# EAGLE board Ges_AndriX (EAGLE 6.4)
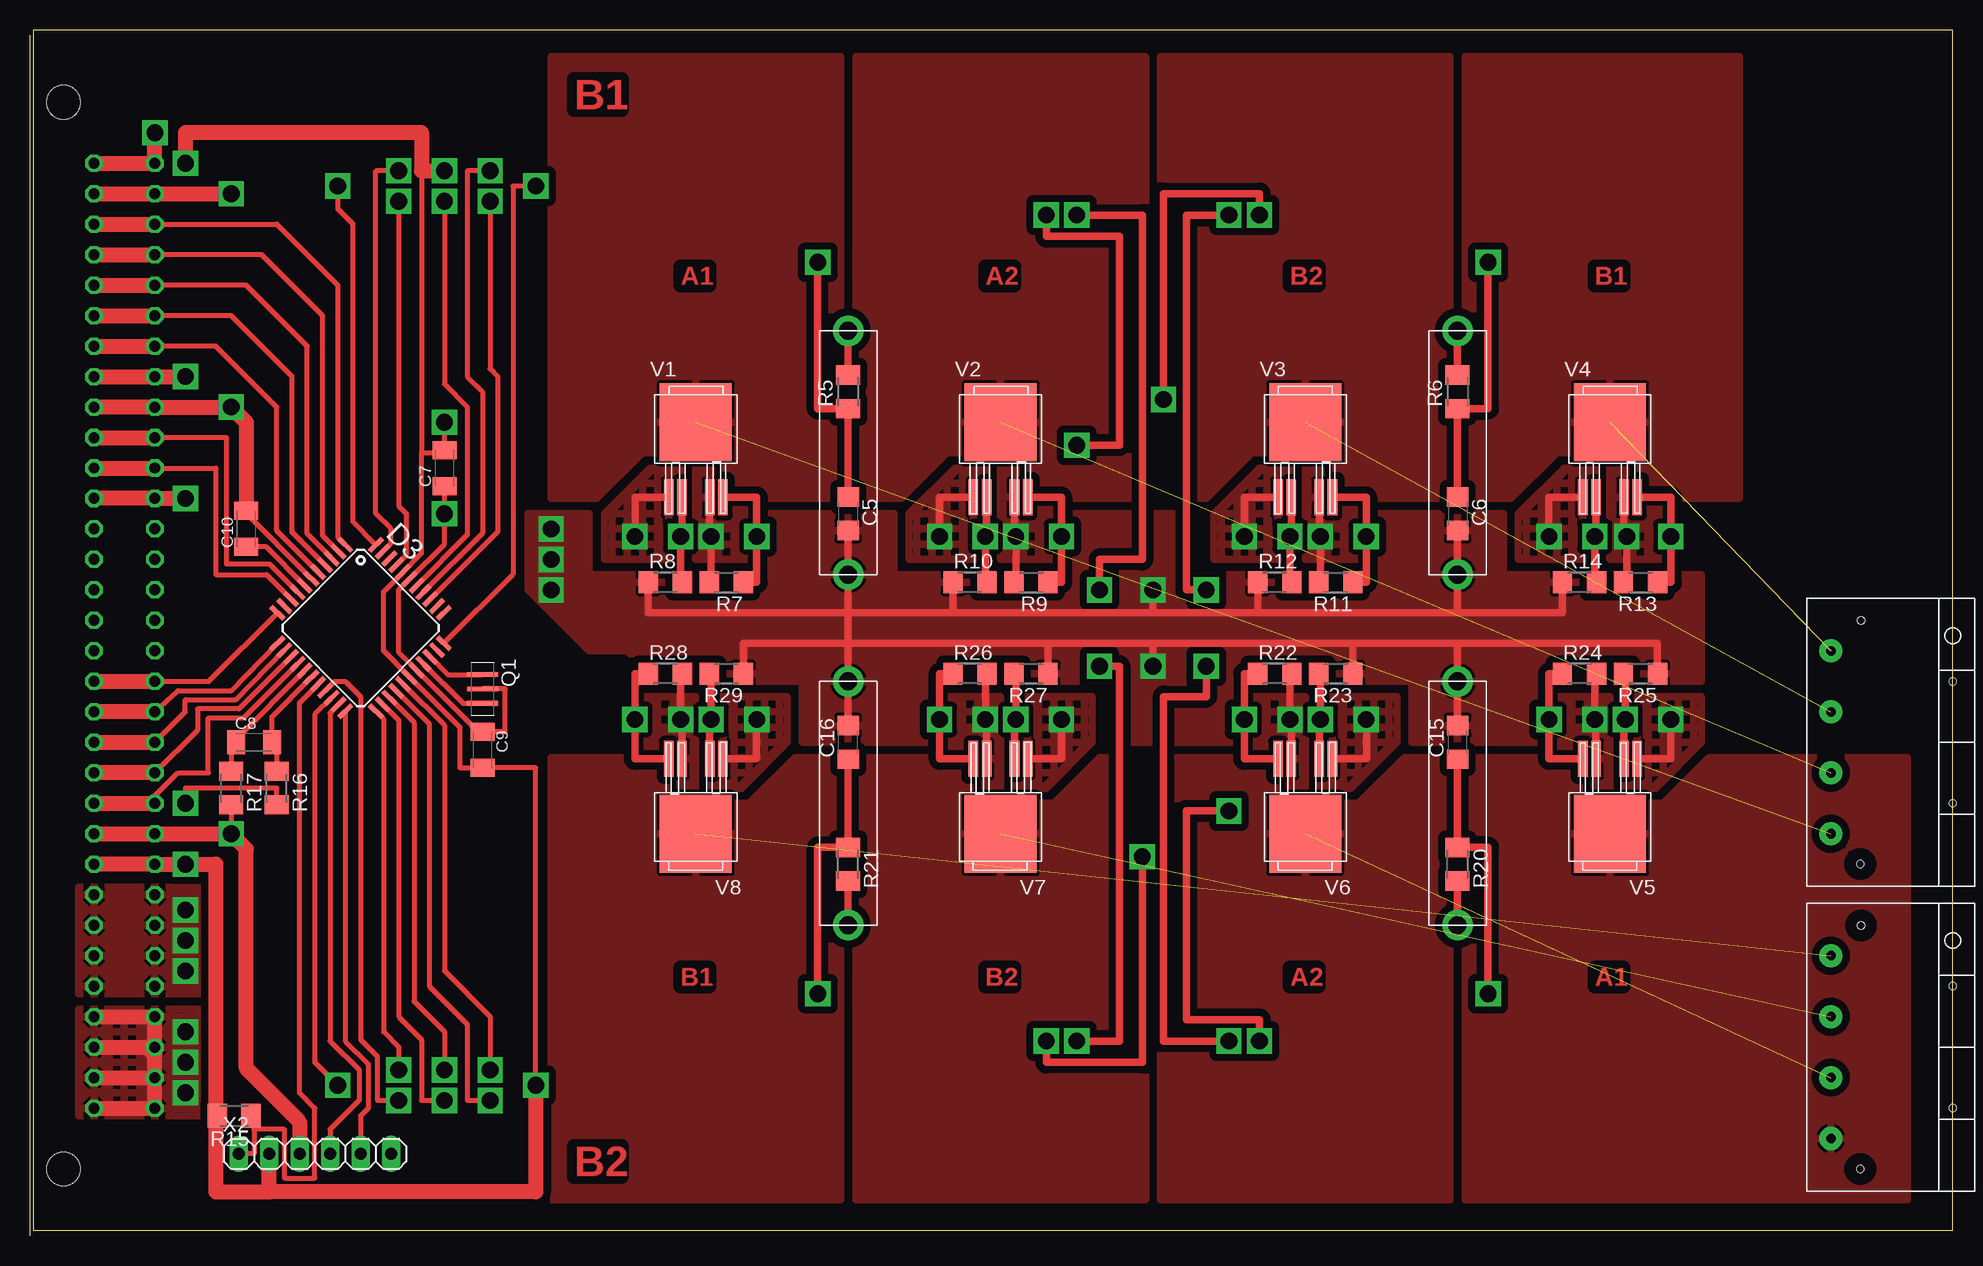
[diagram p0: board, top side]
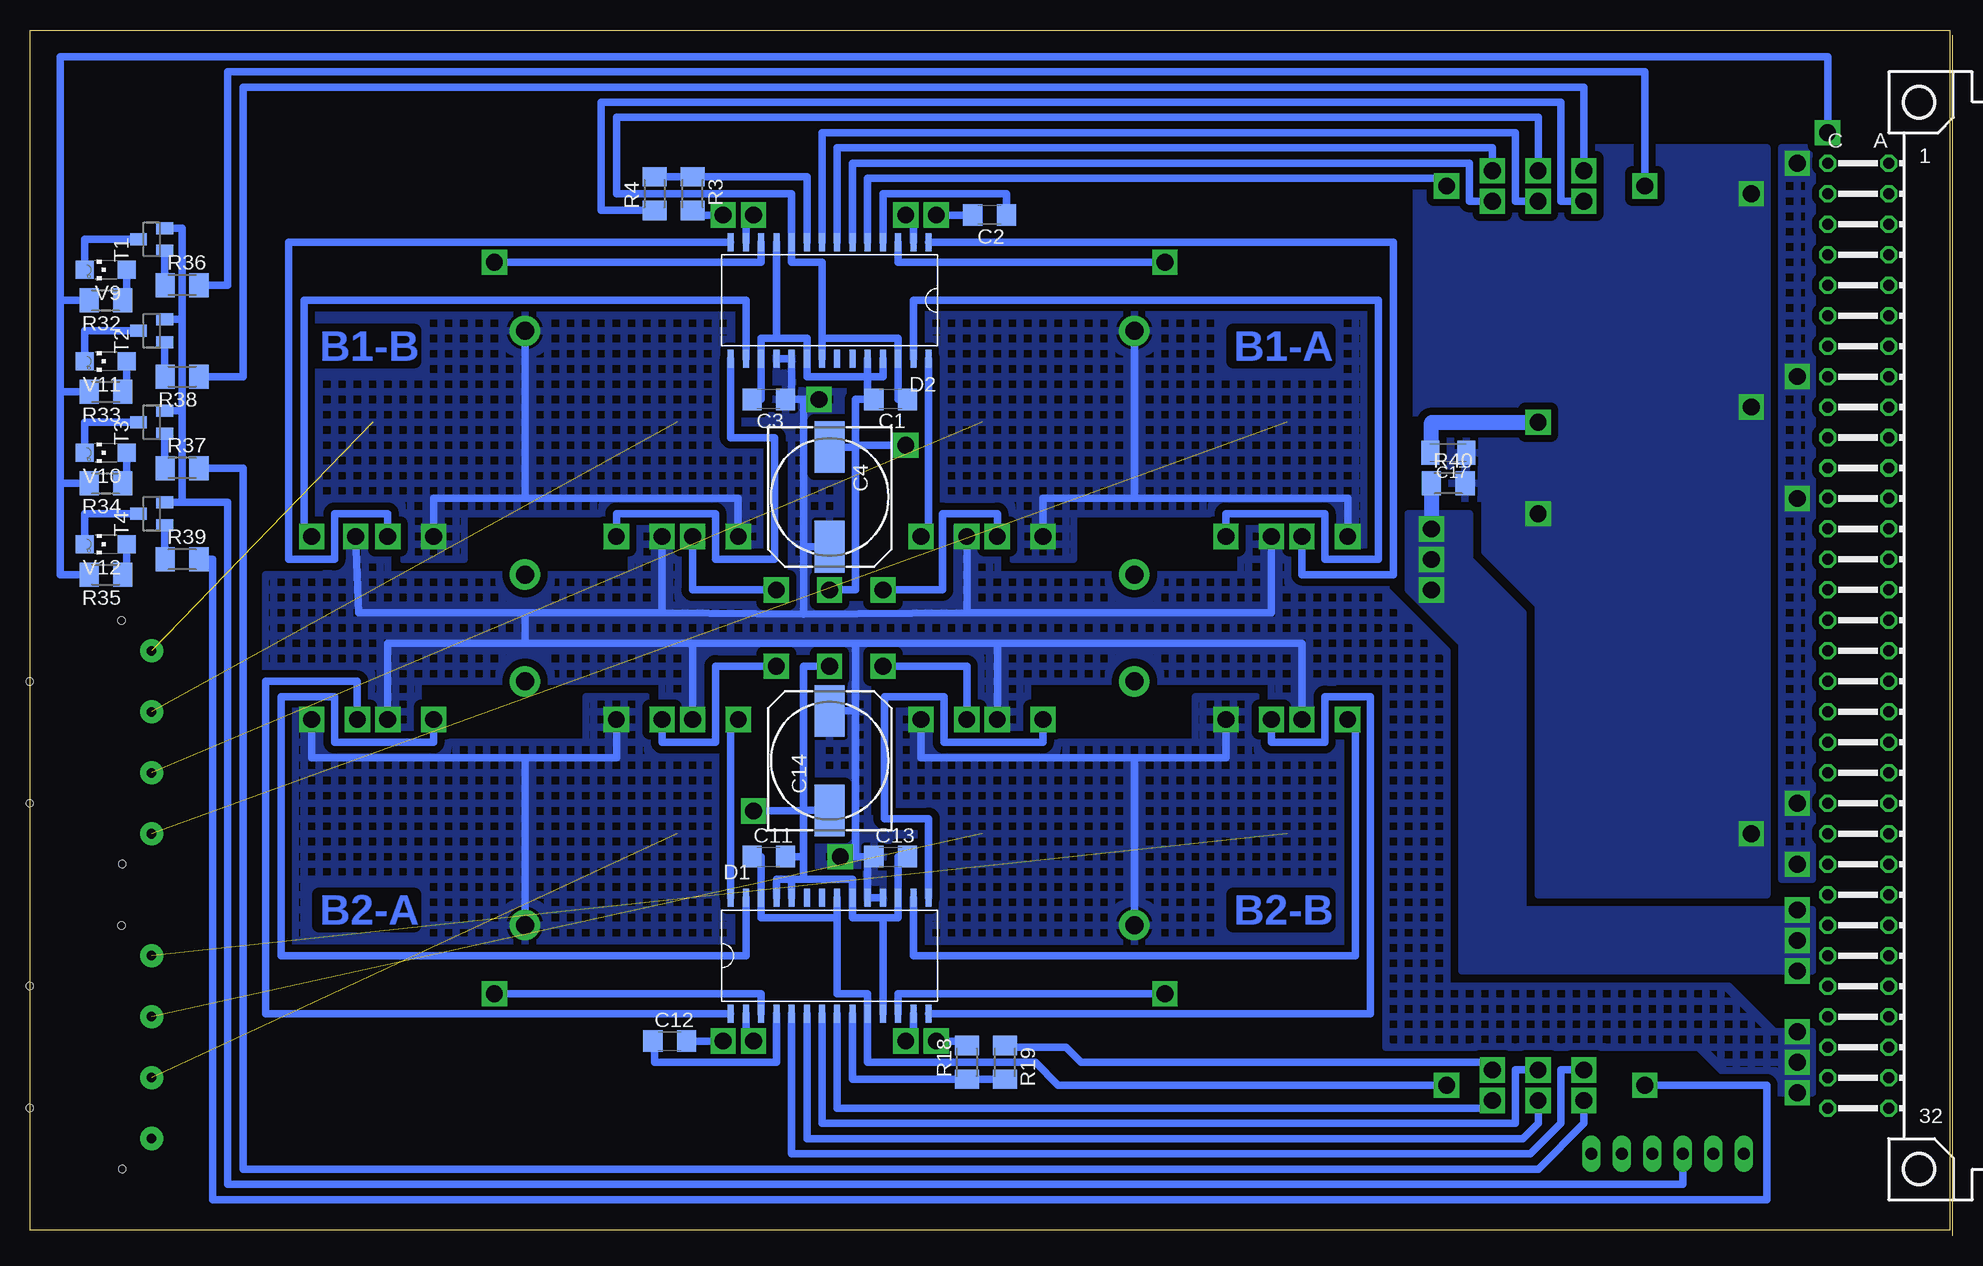
[diagram p1: board, bottom side, seen from below]

Size 160 x 100 mm. Coordinates in mm from the lower left corner, seen from the top.
Outline: 0,0 160,0 160,100 0,100 0,0
Copper layers (1*16): Top 0.035mm / dielectric 1.5mm / Bottom 0.035mm
Design rules "default": minimum track width 10mil, minimum drill 24mil, track to track 8mil, track to pad 8mil, pad to pad 8mil, via to via 8mil, smd to smd 8mil, copper to edge 40mil, drill to drill 8mil, minimum pad ring 10mil, minimum via ring 8mil, stop-mask expansion 4mil, vias tented up to drill 0mil, thermal gap 10mil
tKeepout: area 0,0 to 160,2.5; area 0,97.8 to 160,100.3

## Footprints (pad centres in the part's own frame; a part is rotated, then mirrored left to right if it is on the bottom)
C1206 = smd 1.6 x 1.8: 1 -1.4,0; 2 1.4,0
140CLH-1010 = smd 4.3 x 2.5: + 4.15,0; - -4.15,0
C1206K = smd 1.5 x 2: 1 -1.5,0; 2 1.5,0
SO28 = smd 0.5 x 1.5: AGND -4.445,4.845; ANN -5.715,4.845; BL1 4.445,-4.845; BL2 5.715,4.845; CSN 0.635,-4.845; ENN 1.905,-4.845; GND 1.905,4.845; HA1 -6.985,4.845; HA2 -8.255,4.845; HB1 6.985,4.845; HB2 8.255,4.845; INA -1.905,4.845; INB -0.635,4.845; LA1 -8.255,-4.845; LA2 -6.985,-4.845; LB1 8.255,-4.845; LB2 6.985,-4.845; OSC -4.445,-4.845; SCK -0.635,-4.845; SDI -1.905,-4.845; SDO -3.175,-4.845; SLP -3.175,4.845; SPE 3.175,-4.845; SRA -5.715,-4.845; SRB 5.715,-4.845; VCC 0.635,4.845; VS 3.175,4.845; VT 4.445,4.845
TQFP44 = smd 1.5 x 0.4: 1 -5.8,4; 2 -5.8,3.2; 3 -5.8,2.4; 4 -5.8,1.6; 5 -5.8,0.8; 6 -5.8,0; 7 -5.8,-0.8; 8 -5.8,-1.6; 9 -5.8,-2.4; 10 -5.8,-3.2; 11 -5.8,-4; 23 5.8,-4; 24 5.8,-3.2; 25 5.8,-2.4; 26 5.8,-1.6; 27 5.8,-0.8; 28 5.8,0; 29 5.8,0.8; 30 5.8,1.6; 31 5.8,2.4; 32 5.8,3.2; 33 5.8,4 | smd 0.4 x 1.5: 12 -4,-5.8; 13 -3.2,-5.8; 14 -2.4,-5.8; 15 -1.6,-5.8; 16 -0.8,-5.8; 17 0,-5.8; 18 0.8,-5.8; 19 1.6,-5.8; 20 2.4,-5.8; 21 3.2,-5.8; 22 4,-5.8; 34 4,5.8; 35 3.2,5.8; 36 2.4,5.8; 37 1.6,5.8; 38 0.8,5.8; 39 0,5.8; 40 -0.8,5.8; 41 -1.6,5.8; 42 -2.4,5.8; 43 -3.2,5.8; 44 -4,5.8
CSTER12M = smd 0.4 x 2.6: 1 -1.2,0; 2 0,0; 3 1.2,0
RS = drill 1.5 pad 2.54: P$1 -10.15,0; P$2 10.15,0
M1206 = smd 1.6 x 2: 1 -1.4,0; 2 1.4,0
R1206 = smd 1.6 x 1.803: 1 -1.422,0; 2 1.422,0
SOT23 = smd 1 x 1.4: 1 -0.95,-1.1; 2 0.95,-1.1; 3 0,1.1
TO-252-4L = smd 6 x 6.5: D1D2 0,0 | smd 0.8 x 3: G1 -1.16,-6.25; G2 2.26,-6.25; S1 -2.26,-6.25; S2 1.16,-6.25
CHIPLED_1206 = smd 1.5 x 1.5: A 0,-1.75; C 0,1.75
MAC64L = drill 0.914 octagon: A1 -2.54,39.37; A2 -2.54,36.83; A3 -2.54,34.29; A4 -2.54,31.75; A5 -2.54,29.21; A6 -2.54,26.67; A7 -2.54,24.13; A8 -2.54,21.59; A9 -2.54,19.05; A10 -2.54,16.51; A11 -2.54,13.97; A12 -2.54,11.43; A13 -2.54,8.89; A14 -2.54,6.35; A15 -2.54,3.81; A16 -2.54,1.27; A17 -2.54,-1.27; A18 -2.54,-3.81; A19 -2.54,-6.35; A20 -2.54,-8.89; A21 -2.54,-11.43; A22 -2.54,-13.97; A23 -2.54,-16.51; A24 -2.54,-19.05; A25 -2.54,-21.59; A26 -2.54,-24.13; A27 -2.54,-26.67; A28 -2.54,-29.21; A29 -2.54,-31.75; A30 -2.54,-34.29; A31 -2.54,-36.83; A32 -2.54,-39.37; C1 -7.62,39.37; C2 -7.62,36.83; C3 -7.62,34.29; C4 -7.62,31.75; C5 -7.62,29.21; C6 -7.62,26.67; C7 -7.62,24.13; C8 -7.62,21.59; C9 -7.62,19.05; C10 -7.62,16.51; C11 -7.62,13.97; C12 -7.62,11.43; C13 -7.62,8.89; C14 -7.62,6.35; C15 -7.62,3.81; C16 -7.62,1.27; C17 -7.62,-1.27; C18 -7.62,-3.81; C19 -7.62,-6.35; C20 -7.62,-8.89; C21 -7.62,-11.43; C22 -7.62,-13.97; C23 -7.62,-16.51; C24 -7.62,-19.05; C25 -7.62,-21.59; C26 -7.62,-24.13; C27 -7.62,-26.67; C28 -7.62,-29.21; C29 -7.62,-31.75; C30 -7.62,-34.29; C31 -7.62,-36.83; C32 -7.62,-39.37 | hole 2.794: 0,44.45; 0,-44.45
1X06 = drill 1.016 long: 1 -6.35,0; 2 -3.81,0; 3 -1.27,0; 4 1.27,0; 5 3.81,0; 6 6.35,0
X_4POL = drill 0.8 pad 1.93: 1 -7.62,0; 2 -2.54,0; 3 2.54,0; 4 7.62,0 | hole 0.6: -5.08,10.16; 5.08,10.16; 10.15,2.45; -10.15,2.5

## Placement (x,y rotation side)
C1  100n  [C1206]  88.27,69.22 180 bottom
C2  1nF  [C1206]  80.01,84.58 180 bottom
C3  220n  [C1206]  98.42,69.22 180 bottom
C4  100µ  [140CLH-1010]  93.34,61.09 270 bottom
C5  10n  [C1206]  67.94,59.69 270 top
C6  10n  [C1206]  118.75,59.69 270 top
C7  100n  [C1206K]  34.29,63.5 90 top
C8  100n  [C1206K]  18.41,40.64 0 top
C9  100n  [C1206K]  37.47,40.01 270 top
C10  100n  [C1206K]  17.78,58.42 90 top
C11  100n  [C1206]  98.42,31.11 0 bottom
C12  1nF  [C1206]  106.68,15.75 0 bottom
C13  220n  [C1206]  88.27,31.11 0 bottom
C14  100µ  [140CLH-1010]  93.34,39.12 90 bottom
C15  10n  [C1206]  118.75,40.64 90 top
C16  10n  [C1206]  67.94,40.64 90 top
C17  100n  [C1206K]  41.78,64.77 180 bottom
D1  TMC249  [SO28]  93.34,22.86 0 bottom
D2  TMC249  [SO28]  93.34,77.47 180 bottom
D3  PIC24FJ64GA004_PRO  [TQFP44]  27.3,50.16 315 top
Q1  CSTCR6M00G53Z  [CSTER12M]  37.47,45.09 270 top
R1  30m  [RS]  118.75,64.77 90 top
R2  30m  [RS]  67.94,64.77 90 top
R3  160k  [M1206]  104.78,86.36 270 bottom
R4  10k  [M1206]  107.95,86.36 90 bottom
R5  100R  [M1206]  67.94,69.85 90 top
R6  100R  [M1206]  118.75,69.85 90 top
R7  100k  [R1206]  57.78,53.98 180 top
R8  100k  [R1206]  52.7,53.98 0 top
R9  100k  [R1206]  83.19,53.98 180 top
R10  100k  [R1206]  78.11,53.98 0 top
R11  100k  [R1206]  108.58,53.98 180 top
R12  100k  [R1206]  103.5,53.98 0 top
R13  100k  [R1206]  133.99,53.98 180 top
R14  100k  [R1206]  128.91,53.98 0 top
R15  4k7  [M1206]  16.76,9.53 180 top
R16  10R  [M1206]  20.32,36.83 270 top
R17  10R  [M1206]  16.51,36.83 270 top
R18  160k  [M1206]  81.92,13.97 90 bottom
R19  10k  [M1206]  78.74,13.97 270 bottom
R20  100R  [M1206]  118.75,30.48 270 top
R21  100R  [M1206]  67.94,30.48 270 top
R22  100k  [R1206]  103.5,46.35 0 top
R23  100k  [R1206]  108.58,46.35 180 top
R24  100k  [R1206]  128.91,46.35 0 top
R25  100k  [R1206]  133.99,46.35 180 top
R26  100k  [R1206]  78.11,46.35 0 top
R27  100k  [R1206]  83.19,46.35 180 top
R28  100k  [R1206]  52.7,46.35 0 top
R29  100k  [R1206]  57.78,46.35 180 top
R30  30m  [RS]  118.75,35.56 270 top
R31  30m  [RS]  67.94,35.56 270 top
R32  270R  [M1206]  153.67,77.47 180 bottom
R33  270R  [M1206]  153.67,69.85 180 bottom
R34  270R  [M1206]  153.67,62.23 180 bottom
R35  270R  [M1206]  153.67,54.61 180 bottom
R36  2k7  [M1206]  147.32,78.74 0 bottom
R37  2k7  [M1206]  147.32,63.5 0 bottom
R38  2k7  [M1206]  147.32,71.12 180 bottom
R39  2k7  [M1206]  147.32,55.88 0 bottom
R40  10R  [M1206]  41.78,62.23 0 bottom
T1  BC846  [SOT23]  149.86,82.55 90 bottom
T2  BC846  [SOT23]  149.86,74.93 90 bottom
T3  BC846  [SOT23]  149.86,67.31 90 bottom
T4  BC846  [SOT23]  149.86,59.69 90 bottom
V1  FDD8424H  [TO-252-4L]  55.24,67.31 0 top
V2  FDD8424H  [TO-252-4L]  80.64,67.31 0 top
V3  FDD8424H  [TO-252-4L]  106.05,67.31 0 top
V4  FDD8424H  [TO-252-4L]  131.44,67.31 0 top
V5  FDD8424H  [TO-252-4L]  131.44,33.02 180 top
V6  FDD8424H  [TO-252-4L]  106.05,33.02 180 top
V7  FDD8424H  [TO-252-4L]  80.64,33.02 180 top
V8  FDD8424H  [TO-252-4L]  55.24,33.02 180 top
V9  [CHIPLED_1206]  153.67,80.01 90 bottom
V10  [CHIPLED_1206]  153.67,64.77 90 bottom
V11  [CHIPLED_1206]  153.67,72.39 90 bottom
V12  [CHIPLED_1206]  153.67,57.15 90 bottom
X1  MAC64LE  [MAC64L]  2.54,49.53 0 bottom
X2  [1X06]  23.5,6.35 0 top
X3  X_4POL  [X_4POL]  149.86,15.24 270 top
X4  X_4POL  [X_4POL]  149.86,40.64 270 top

## Library data of the parts
C1-C6 C11-C16 R7-R14 R22-R29 = resistor
C7-C10 C17 R3-R6 R15-R21 R32-R40 = rcl
D1 D2 R1 R2 R30 R31 X3 X4 = Projekt
D3 = microchip
Q1 = cstce-resonator; MPN: CSTCC12M0; OC_FARNELL: 1170434; OC_NEWARK: 25M8759
T1-T4 = transistor
V1-V8 = Projekt; V: FDD8424H
V9-V12 = led
X1 = con-vg
X2 = pinhead

## Nets
+3V3: C1.1 C7.2 C9.2 C11.1 C17.2 D1.ANN D1.SPE D1.VCC D2.ANN D2.SPE D2.VCC D3.28 D3.40 R15.2 R16.2 X1.A8 X1.A12 X1.A24 X1.C8 X1.C12 X1.C24 X2.2
+5V: R32.2 R33.2 R34.2 R35.2 X1.A1 X1.C1
+24V: C3.1 C4.+ C13.1 C14.+ D1.VS D1.VT D2.VS D2.VT R3.2 R7.2 R9.2 R11.2 R13.2 R18.2 R22.2 R24.2 R26.2 R28.2 V1.S2 V2.S2 V3.S2 V4.S2 V5.S2 V6.S2 V7.S2 V8.S2 X1.A29 X1.A30 X1.A31 X1.A32 X1.C29 X1.C30 X1.C31 X1.C32
B1-A1: V1.D1D2 X4.4
B1-A2: V2.D1D2 X4.3
B1-B1: V4.D1D2 X4.1
B1-B2: V3.D1D2 X4.2
B1-CSA: R2.P$2 R5.2 V1.S1 V2.S1
B1-CSB: R1.P$2 R6.2 V3.S1 V4.S1
B1-CSN: D2.CSN D3.38
B1-ENN: D3.41 R4.1
B1-HA1: D2.HA1 R7.1 V1.G2
B1-HA2: D2.HA2 R9.1 V2.G2
B1-HB1: D2.HB1 R13.1 V4.G2
B1-HB2: D2.HB2 R11.1 V3.G2
B1-LA1: D2.LA1 R8.2 V1.G1
B1-LA2: D2.LA2 R10.2 V2.G1
B1-LB1: D2.LB1 R14.2 V4.G1
B1-LB2: D2.LB2 R12.2 V3.G1
B1-SCK: D2.SCK D3.37
B1-SDI: D2.SDI D3.36
B1-SDO: D2.SDO D3.33
B1-SRA: C5.1 D2.SRA R5.1
B1-SRB: C6.1 D2.SRB R6.1
B2-A1: V5.D1D2 X3.4
B2-A2: V6.D1D2 X3.3
B2-B1: V8.D1D2 X3.1
B2-B2: V7.D1D2 X3.2
B2-CSA: R20.2 R30.P$2 V5.S1 V6.S1
B2-CSB: R21.2 R31.P$2 V7.S1 V8.S1
B2-CSN: D1.CSN D3.26
B2-ENN: D3.27 R19.1
B2-HA1: D1.HA1 R24.1 V5.G2
B2-HA2: D1.HA2 R22.1 V6.G2
B2-HB1: D1.HB1 R28.1 V8.G2
B2-HB2: D1.HB2 R26.1 V7.G2
B2-LA1: D1.LA1 R25.2 V5.G1
B2-LA2: D1.LA2 R23.2 V6.G1
B2-LB1: D1.LB1 R29.2 V8.G1
B2-LB2: D1.LB2 R27.2 V7.G1
B2-SCK: D1.SCK D3.25
B2-SDI: D1.SDI D3.24
B2-SDO: D1.SDO D3.23
B2-SRA: C15.1 D1.SRA R20.1
B2-SRB: C16.1 D1.SRB R21.1
CODE0: D3.1 X1.A3 X1.C3
CODE1: D3.2 X1.A4 X1.C4
CODE2: D3.3 X1.A5 X1.C5
CODE3: D3.4 X1.A6 X1.C6
CODE4: D3.5 X1.A7 X1.C7
CTRL0: D3.11 X1.A18 X1.C18
CTRL1: D3.12 X1.A19 X1.C19
CTRL2: D3.13 X1.A20 X1.C20
CTRL3: D3.14 X1.A21 X1.C21
CTRL4: D3.15 X1.A22 X1.C22
GND: C1.2 C2.2 C3.2 C4.- C5.2 C6.2 C11.2 C12.2 C13.2 C14.- C15.2 C16.2 D1.AGND D1.BL1 D1.BL2 D1.GND D1.SLP D2.AGND D2.BL1 D2.BL2 D2.GND D2.SLP R1.P$1 R2.P$1 R8.1 R10.1 R12.1 R14.1 R23.1 R25.1 R27.1 R29.1 R30.P$1 R31.P$1 R40.1 X1.A25 X1.A26 X1.A27 X1.A28 X1.C25 X1.C26 X1.C27 X1.C28
GND1: C7.1 C9.1 C10.2 C17.1 D3.6 D3.29 D3.39 Q1.2 R17.2 R40.2 T1.2 T2.2 T3.2 T4.2 X1.A2 X1.A9 X1.A23 X1.C2 X1.C9 X1.C23 X2.3
I2CSCL: D3.9 X1.A11 X1.C11
I2CSDA: D3.8 X1.A10 X1.C10
LED1: D3.44 R36.2
LED2: D3.43 R38.1
LED3: D3.19 R37.2
LED4: D3.20 R39.2
MCLR: D3.18 R15.1 X2.1
N$1: C2.1 D2.OSC
N$3: C8.2 D3.17 R16.1
N$4: C8.1 D3.16 R17.1
N$5: C10.1 D3.7
N$6: T1.3 V9.C
N$8: C12.1 D1.OSC
N$9: T2.3 V11.C
N$10: T3.3 V10.C
N$11: D1.ENN R18.1 R19.2
N$12: T4.3 V12.C
N$13: R32.1 V9.A
N$14: R33.1 V11.A
N$15: R34.1 V10.A
N$16: R35.1 V12.A
N$17: R36.1 T1.1
N$18: D2.ENN R3.1 R4.2
N$19: R37.1 T3.1
N$20: R38.2 T2.1
N$21: R39.1 T4.1
OSC1: D3.31 Q1.1
OSC2: D3.30 Q1.3
PGC: D3.22 X2.5
PGD: D3.21 X2.4
RESV0: X1.A13
RESV1: X1.C13
RESV2: X1.A14
RESV3: X1.C14
RESV4: X1.A15
RESV5: X1.C15
RESV6: X1.A16
RESV7: X1.C16
RESV8: X1.A17
RESV9: X1.C17

## Tracks (layer width: path | path; a pad name or v marks a point on that pad's centre or on a via)
+3V3  (via drill 1.4)
  Top 0.406: 32.38,64.77 32.38,56.38 D3.40 29.21,53.2 29.21,48.26 D3.28 35.56,41.91 35.56,38.51 C9.2 41.91,38.51 v41.91,12.06 | 32.38,64.77 33.66,64.77 C7.2 v34.29,67.31 | R15.2 15.24,9.53 | 32.38,88.27 32.38,64.77 | R16.2 20.32,36.83 12.7,36.83 v12.7,35.56
  Top 1.27: X1.A24 X1.C24 v12.7,30.48 15.24,30.48 15.24,9.53 15.24,3.17 19.68,3.17 | X1.A12 X1.C12 v12.7,60.96 | X1.A8 X1.C8 v12.7,71.12 | 19.68,3.17 41.91,3.17 v41.91,12.06 | 19.68,3.17 X2.2 | v12.7,88.9 12.7,91.44 32.38,91.44 32.38,88.27 v34.29,88.27
  Bottom 0.61: 92.71,26.04 99.06,26.04 D1.ANN 99.06,31.11 C11.1 | 92.71,26.04 D1.VCC | 92.71,26.04 92.71,19.68 90.17,19.68 D1.SPE 90.17,13.97 76.2,13.97 74.3,12.06 v41.91,12.06 | D2.VCC 93.98,74.3 | 93.98,74.3 93.98,80.64 96.52,80.64 D2.SPE 96.52,86.36 111.12,86.36 111.12,92.71 34.29,92.71 v34.29,88.27 | 93.98,74.3 87.63,74.3 D2.ANN 87.63,69.22 C1.1
  Bottom 1.27: C17.2 43.18,64.77 43.18,67.31 v34.29,67.31
  pour Bottom (isolate 0.61, hatched): 11.43,29.21 13.97,29.21 13.97,90.17 11.43,90.17
+5V  (via drill 1.4)
  Top 1.27: X1.A1 X1.C1 v10.16,91.44
  Bottom 0.61: R35.2 157.48,54.61 157.48,62.23 | 157.48,62.23 R34.2 | R33.2 157.48,69.85 | 157.48,69.85 157.48,62.23 | R32.2 157.48,77.47 | 157.48,77.47 157.48,69.85 | v10.16,91.44 10.16,97.79 157.48,97.79 157.48,77.47
+24V  (via drill 1.4)
  Top 0.61: V5.S2 130.28,42.44 v130.18,42.55 130.18,46.35 R24.2 | V6.S2 104.89,42.44 v104.78,42.55 104.78,46.35 R22.2 | V8.S2 54.09,42.44 v53.98,42.55 53.98,46.35 R28.2 | V7.S2 79.48,42.55 v79.38,42.55 79.38,46.35 R26.2 | v92.46,31.11 92.46,13.97 84.45,13.97 v84.45,15.75 | V1.S2 56.41,57.78 v56.52,57.78 56.52,53.98 R7.2 | V2.S2 81.81,57.78 v81.92,57.78 81.92,53.98 R9.2 | V3.S2 107.2,57.78 v107.31,57.78 107.31,53.98 R11.2 | 132.59,53.98 R13.2 132.84,54.25 v132.84,57.78 132.6,58.02 V4.S2 | v94.23,69.22 94.23,86.36 102.23,86.36 v102.23,84.58
  Top 1.27: X1.A29 X1.C29 X1.C30 9.53,15.24 | X1.A30 9.53,15.24 | X1.A31 X1.C31 | X1.A32 X1.C32 X1.C31 | X1.C31 10.16,14.61 9.53,15.24
  Bottom 0.61: v130.18,42.55 130.18,48.9 118.75,48.9 | 118.75,48.9 104.78,48.9 | 104.78,48.9 v104.78,42.55 | v53.98,42.55 53.98,48.9 79.38,48.9 | 79.38,48.9 v79.38,42.55 | 104.78,48.9 91.19,48.9 | 91.19,48.9 79.38,48.9 | 91.19,43.27 91.19,48.9 | D1.VT D1.VS 90.17,31.11 | 91.19,43.27 C14.+ | v84.45,15.75 81.92,15.75 R18.2 | 91.19,31.11 v92.46,31.11 | 91.19,43.27 91.19,31.11 | 91.19,31.11 90.17,31.11 | 90.17,31.11 C13.1 | v56.52,57.78 56.52,51.44 81.92,51.44 | 81.92,51.44 v81.92,57.78 | v107.31,57.78 107.31,51.44 | 107.31,51.44 118.75,51.44 | 118.75,51.44 132.59,51.44 v132.84,57.78 | 81.92,51.44 95.5,51.31 | 95.5,51.31 107.31,51.44 | 96.52,69.22 D2.VS D2.VT | 96.52,69.22 C3.1 | 95.5,51.31 95.5,56.94 | 95.5,56.94 95.5,69.22 | 95.5,69.22 v94.23,69.22 | C4.+ 95.5,56.94 | 96.52,69.22 95.5,69.22 | v102.23,84.58 104.78,84.58 R3.2 | 118.75,48.9 118.75,51.44
  other vias: 12.7,16.51 12.7,13.97 12.7,11.43
  pour Top (isolate 0.406, hatched): 55.24,63.5 56.52,63.5 56.52,60.96 60.33,60.96 60.33,55.88 55.24,55.88
  pour Top (isolate 0.406, hatched): 80.64,63.5 81.92,63.5 81.92,60.96 85.72,60.96 85.72,55.88 80.64,55.88
  pour Top (isolate 0.406, hatched): 106.05,63.5 107.31,63.5 107.31,60.96 111.12,60.96 111.12,55.88 106.05,55.88
  pour Top (isolate 0.406, hatched): 131.44,63.5 132.72,63.5 132.72,60.96 136.53,60.96 136.53,55.88 131.44,55.88
  pour Top (isolate 0.406, hatched): 131.44,36.83 130.18,36.83 130.18,39.37 126.36,39.37 126.36,44.45 131.44,44.45
  pour Top (isolate 0.406, hatched): 106.05,36.83 104.78,36.83 104.78,39.37 100.97,39.37 100.97,44.45 106.05,44.45
  pour Top (isolate 0.406, hatched): 80.64,36.83 79.38,36.83 79.38,39.37 75.56,39.37 75.56,44.45 80.64,44.45
  pour Top (isolate 0.406, hatched): 55.24,36.83 53.98,36.83 53.98,39.37 50.16,39.37 50.16,44.45 55.24,44.45
  pour Bottom (isolate 0.61, hatched): 46.99,45.72 51.44,45.72 51.44,40.64 56.52,40.64 56.52,45.72 76.83,45.72 76.83,40.64 81.92,40.64 81.92,45.72 90.17,45.72 90.17,34.29 84.45,34.29 84.45,26.67 100.97,26.67 100.97,34.29 96.52,34.29 96.52,45.72 102.23,45.72 102.23,40.64 107.31,40.64 107.31,45.72 127.64,45.72 127.64,40.64 132.72,40.64 132.72,45.72 140.34,45.72 140.34,50.8 46.99,50.8
  pour Bottom (isolate 0.61, hatched): 140.34,54.61 135.25,54.61 135.25,59.69 130.18,59.69 130.18,54.61 109.86,54.61 109.86,59.69 104.78,59.69 104.78,54.61 96.52,54.61 96.52,66.04 102.23,66.04 102.23,73.66 85.72,73.66 85.72,66.04 90.17,66.04 90.17,54.61 84.45,54.61 84.45,59.69 79.38,59.69 79.38,54.61 59.05,54.61 59.05,59.69 53.98,59.69 53.98,54.61 46.99,54.61 46.99,49.53 140.34,49.53
  pour Top (isolate 0.61, hatched): 3.81,18.41 13.97,18.41 13.97,9.53 3.81,9.53
  pour Bottom (isolate 0.61, hatched): 11.43,16.51 11.43,11.43 17.14,11.43 20.95,15.24 46.99,15.24 46.99,53.34 41.91,48.26 41.91,20.32 18.41,20.32 14.61,16.51
B1-A1  (1 unrouted)
  pour Top (isolate 0.61): 43.18,60.96 46.99,60.96 50.8,64.77 57.78,64.77 57.78,60.96 67.31,60.96 67.31,97.79 43.18,97.79
B1-A2  (1 unrouted)
  pour Top (isolate 0.61): 68.58,60.96 72.39,60.96 76.2,64.77 83.19,64.77 83.19,60.96 92.71,60.96 92.71,97.79 68.58,97.79
B1-B1  (1 unrouted)
  pour Top (isolate 0.61): 119.38,60.96 123.19,60.96 127,64.77 133.99,64.77 133.99,60.96 142.24,60.96 142.24,97.79 119.38,97.79
B1-B2  (1 unrouted)
  pour Top (isolate 0.61): 93.98,60.96 97.79,60.96 101.6,64.77 108.58,64.77 108.58,60.96 118.11,60.96 118.11,97.79 93.98,97.79
B1-CSA  (via drill 1.4)
  Top 0.61: V1.S1 50.16,61.06 v50.16,57.78 | V2.S1 75.56,61.06 v75.56,57.78 | R5.2 R2.P$2
  Bottom 0.61: v50.16,57.78 50.16,60.96 67.94,60.96 | 67.94,60.96 75.56,60.96 v75.56,57.78 | R2.P$2 67.94,60.96
  pour Top (isolate 0.406, hatched): 47.62,59.69 51.44,63.5 53.98,63.5 53.98,55.88 47.62,55.88
  pour Top (isolate 0.406, hatched): 73.03,59.69 76.83,63.5 79.38,63.5 79.38,55.88 73.03,55.88
  pour Bottom (isolate 0.61, hatched): 47.62,55.88 52.7,55.88 52.7,59.69 73.03,59.69 73.03,55.88 78.11,55.88 78.11,59.69 87,59.69 87,77.47 47.62,77.47
B1-CSB  (via drill 1.4)
  Top 0.61: V3.S1 100.97,61.06 v100.97,57.78 | v126.36,57.78 126.36,61.06 V4.S1 | R1.P$2 R6.2
  Bottom 0.61: v100.97,57.78 100.97,60.96 118.75,60.96 | 118.75,60.96 126.36,60.96 v126.36,57.78 | R1.P$2 118.75,60.96
  pour Top (isolate 0.406, hatched): 98.42,59.69 102.23,63.5 104.78,63.5 104.78,55.88 98.42,55.88
  pour Top (isolate 0.406, hatched): 123.83,59.69 127.64,63.5 130.18,63.5 130.18,55.88 123.83,55.88
  pour Bottom (isolate 0.61, hatched): 98.42,55.88 103.5,55.88 103.5,59.69 123.83,59.69 123.83,55.88 128.91,55.88 128.91,59.69 137.79,59.69 137.79,77.47 98.42,77.47
B1-CSN  (via drill 1.4)
  Top 0.406: D3.38 36.2,57.92 36.2,68.58 34.29,70.48 v34.29,85.72
  Bottom 0.61: D2.CSN 93.98,91.44 36.2,91.44 36.2,85.72 v34.29,85.72
B1-ENN  (via drill 1.4)
  Top 0.406: D3.41 31.11,56.24 31.11,59.69 30.48,60.33 v30.48,85.72
  Bottom 0.61: R4.1 112.39,84.96 112.39,93.98 32.38,93.98 32.38,85.72 v30.48,85.72
B1-HA1  (via drill 1.4)
  Top 0.61: V1.G2 60.33,61.06 v60.33,57.78 60.33,53.98 R7.1
  Bottom 0.61: v60.33,57.78 60.33,59.69 52.07,59.69 52.07,55.88 47.62,55.88 47.62,77.47 86.36,77.47 D2.HA1
B1-HA2  (via drill 1.4)
  Top 0.61: V2.G2 85.72,61.06 v85.72,57.78 85.72,53.98 R9.1
  Bottom 0.61: v85.72,57.78 85.72,57.15 85.09,57.15 D2.HA2
B1-HB1  (via drill 1.4)
  Top 0.61: R13.1 136.53,53.98 v136.53,57.78 136.53,61.06 V4.G2
  Bottom 0.61: v136.53,57.78 137.16,57.78 137.16,77.47 100.33,77.47 D2.HB1
B1-HB2  (via drill 1.4)
  Top 0.61: V3.G2 111.12,61.06 v111.12,57.78 111.12,53.98 R11.1
  Bottom 0.61: v111.12,57.78 111.12,59.69 102.87,59.69 102.87,55.88 97.92,55.88 97.92,66.04 101.6,66.04 D2.HB2
B1-LA1  (via drill 1.4)
  Top 0.61: V1.G1 54.09,57.78 v53.98,57.78 53.98,53.98 R8.2
  Bottom 0.61: v53.98,57.78 53.98,54.61 46.35,54.61 46.35,82.31 D2.LA1
B1-LA2  (via drill 1.4)
  Top 0.61: V2.G1 79.48,57.78 v79.38,57.78 79.38,53.98 R10.2 | v87,84.58 92.46,84.58 92.46,55.88 88.9,55.88 v88.9,53.34
  Bottom 0.61: 79.38,57.15 v79.38,57.78 79.38,59.69 83.95,59.69 83.95,53.34 v88.9,53.34 | D2.LA2 86.36,84.58 v87,84.58
B1-LB1  (via drill 1.4)
  Top 0.61: 130.28,57.78 v130.18,57.78 | v130.18,57.78 130.18,53.98 R14.2 | V4.G1 130.28,57.9 v130.18,57.78
  Bottom 0.61: v130.18,57.78 130.18,59.69 134.62,59.69 134.62,55.88 138.43,55.88 138.43,82.31 D2.LB1
B1-LB2  (via drill 1.4)
  Top 0.61: V3.G1 104.89,57.78 v104.78,57.78 104.78,53.98 R12.2 | v97.79,53.34 96.14,53.34 96.14,84.58 v99.69,84.58
  Bottom 0.61: v104.78,57.78 104.78,53.34 v97.79,53.34 | v99.69,84.58 100.33,84.58 D2.LB2
B1-SCK  (via drill 1.4)
  Top 0.406: D3.37 37.47,58.06 37.47,69.85 36.2,71.12 36.2,88.27 v38.1,88.27
  Bottom 0.61: D2.SCK 92.71,90.17 38.1,90.17 v38.1,88.27
B1-SDI  (via drill 1.4)
  Top 0.406: D3.36 38.73,58.2 38.73,71.12 38.1,71.75 v38.1,85.72
  Bottom 0.61: D2.SDI 91.44,88.9 40.01,88.9 40.01,85.72 v38.1,85.72
B1-SDO  (via drill 1.4)
  Top 0.406: D3.33 40.01,54.66 40.01,87 v41.91,87
  Bottom 0.61: D2.SDO 90.17,87.63 41.91,87.63 v41.91,87
B1-SRA  (via drill 1.4)
  Top 0.61: C5.1 R5.1 65.41,68.45 v65.41,80.64
  Bottom 0.61: v65.41,80.64 87.63,80.64 D2.SRA
B1-SRB  (via drill 1.4)
  Top 0.61: C6.1 R6.1 121.28,68.45 v121.28,80.64
  Bottom 0.61: v121.28,80.64 99.06,80.64 D2.SRB
B2-A1
  pour Top (isolate 0.61): 156.21,39.37 139.7,39.37 135.89,35.56 128.91,35.56 128.91,39.37 119.38,39.37 119.38,2.54 156.21,2.54
B2-A2  (1 unrouted)
  pour Top (isolate 0.61): 118.11,39.37 114.3,39.37 110.49,35.56 103.5,35.56 103.5,39.37 93.98,39.37 93.98,2.54 118.11,2.54
B2-B1  (1 unrouted)
  pour Top (isolate 0.61): 67.31,39.37 63.5,39.37 59.69,35.56 52.7,35.56 52.7,39.37 43.18,39.37 43.18,2.54 67.31,2.54
B2-B2  (1 unrouted)
  pour Top (isolate 0.61): 92.71,39.37 88.9,39.37 85.09,35.56 78.11,35.56 78.11,39.37 68.58,39.37 68.58,2.54 92.71,2.54
B2-CSA  (via drill 1.4)
  Top 0.61: V5.S1 136.53,39.27 v136.53,42.55 | V6.S1 111.12,39.27 v111.12,42.55 | R20.2 R30.P$2
  Bottom 0.61: v111.12,42.55 111.12,39.37 118.75,39.37 | v136.53,42.55 136.53,39.37 118.75,39.37 | R30.P$2 118.75,39.37
  pour Top (isolate 0.406, hatched): 113.67,40.64 109.86,36.83 107.31,36.83 107.31,44.45 113.67,44.45
  pour Top (isolate 0.406, hatched): 139.06,40.64 135.25,36.83 132.72,36.83 132.72,44.45 139.06,44.45
  pour Bottom (isolate 0.61, hatched): 139.06,44.45 133.99,44.45 133.99,40.64 113.67,40.64 113.67,44.45 108.58,44.45 108.58,40.64 99.69,40.64 99.69,22.86 139.06,22.86
B2-CSB  (via drill 1.4)
  Top 0.61: V7.S1 85.72,39.27 v85.72,42.55 | v60.33,42.55 60.33,39.27 V8.S1 | R31.P$2 R21.2
  Bottom 0.61: v85.72,42.55 85.72,39.37 67.94,39.37 | 67.94,39.37 60.33,39.37 v60.33,42.55 | R31.P$2 67.94,39.37
  pour Top (isolate 0.406, hatched): 62.87,40.64 59.05,36.83 56.52,36.83 56.52,44.45 62.87,44.45
  pour Top (isolate 0.406, hatched): 88.27,40.64 84.45,36.83 81.92,36.83 81.92,44.45 88.27,44.45
  pour Bottom (isolate 0.61, hatched): 88.27,44.45 83.19,44.45 83.19,40.64 62.87,40.64 62.87,44.45 57.78,44.45 57.78,40.64 48.9,40.64 48.9,22.86 88.27,22.86
B2-CSN  (via drill 1.4)
  Top 0.406: D3.26 33.02,42.19 33.02,20.32 36.2,17.14 36.2,10.79 v38.1,10.79
  Bottom 0.61: D1.CSN 92.71,10.16 38.1,10.16 v38.1,10.79
B2-ENN  (via drill 1.4)
  Top 0.406: D3.27 34.29,42.05 34.29,21.59 38.1,17.78 v38.1,13.34
  Bottom 0.61: R19.1 78.74,15.24 73.66,15.24 72.39,13.97 38.1,13.97 v38.1,13.34
B2-HA1  (via drill 1.4)
  Top 0.61: 127.64,46.35 R24.1 126.36,46.35 v126.36,42.55 126.36,39.27 V5.G2
  Bottom 0.61: v126.36,42.55 126.36,40.64 134.62,40.64 134.62,44.45 139.06,44.45 139.06,22.86 100.33,22.86 D1.HA1
B2-HA2  (via drill 1.4)
  Top 0.61: V6.G2 100.97,39.27 v100.97,42.55 100.97,46.35 R22.1 102.23,46.35
  Bottom 0.61: D1.HA2 101.6,42.55 v100.97,42.55
B2-HB1  (via drill 1.4)
  Top 0.61: R28.1 50.16,46.35 v50.16,42.55 50.16,39.27 V8.G2
  Bottom 0.61: v50.16,42.55 49.53,42.55 49.53,22.86 86.36,22.86 D1.HB1
B2-HB2  (via drill 1.4)
  Top 0.61: V7.G2 75.56,39.27 v75.56,42.55 75.56,46.35 R26.1
  Bottom 0.61: v75.56,42.55 75.56,40.64 83.82,40.64 83.82,44.45 88.77,44.45 88.77,34.29 85.09,34.29 D1.HB2
B2-LA1  (via drill 1.4)
  Top 0.61: V5.G1 132.6,42.44 v132.72,42.55 132.72,46.35 R25.2
  Bottom 0.61: v132.72,42.55 132.72,45.72 140.34,45.72 140.34,18.02 D1.LA1
B2-LA2  (via drill 1.4)
  Top 0.61: V6.G1 107.2,42.55 v107.31,42.55 107.31,46.35 R23.2 | v99.69,15.75 94.23,15.75 94.23,44.45 97.79,44.45 v97.79,46.99
  Bottom 0.61: v107.31,42.55 107.31,40.64 102.87,40.64 102.87,46.99 v97.79,46.99 | D1.LA2 100.33,15.75 v99.69,15.75
B2-LB1  (via drill 1.4)
  Top 0.61: V8.G1 56.41,42.55 v56.52,42.55 56.52,46.35 R29.2
  Bottom 0.61: v56.52,42.55 56.52,40.64 52.07,40.64 52.07,44.45 48.26,44.45 48.26,18.02 D1.LB1
B2-LB2  (via drill 1.4)
  Top 0.61: V7.G1 81.81,42.55 v81.92,42.55 81.92,46.35 R27.2 | v88.9,46.99 90.55,46.99 90.55,15.75 v87,15.75
  Bottom 0.61: v81.92,42.55 81.92,46.99 v88.9,46.99 | v87,15.75 86.36,15.75 D1.LB2
B2-SCK  (via drill 1.4)
  Top 0.406: D3.25 31.75,42.33 31.75,19.05 34.29,16.51 v34.29,13.34
  Bottom 0.61: D1.SCK 93.98,8.89 36.2,8.89 36.2,13.34 v34.29,13.34
B2-SDI  (via drill 1.4)
  Top 0.406: D3.24 30.48,42.47 30.48,17.78 32.38,15.88 32.38,10.79 v34.29,10.79
  Bottom 0.61: D1.SDI 95.25,7.62 35.56,7.62 34.29,8.89 v34.29,10.79
B2-SDO  (via drill 1.4)
  Top 0.406: D3.23 29.21,42.6 29.21,16.51 30.48,15.24 v30.48,13.34
  Bottom 0.61: D1.SDO 96.52,6.35 34.92,6.35 32.38,8.89 32.38,13.34 v30.48,13.34
B2-SRA  (via drill 1.4)
  Top 0.61: C15.1 R20.1 121.28,31.88 v121.28,19.68
  Bottom 0.61: D1.SRA 99.06,19.68 v121.28,19.68
B2-SRB  (via drill 1.4)
  Top 0.61: v65.41,19.68 65.41,31.88 R21.1 C16.1
  Bottom 0.61: D1.SRB 87.63,19.68 v65.41,19.68
CODE0
  Top 0.406: X1.C3 20.32,83.82 25.4,78.74 25.4,57.73 D3.1
  Top 1.27: X1.A3 X1.C3
CODE1
  Top 0.406: D3.2 24.13,57.87 24.13,76.2 19.05,81.28 X1.C4
  Top 1.27: X1.A4 X1.C4
CODE2
  Top 0.406: D3.3 22.86,58 22.86,73.66 17.78,78.74 X1.C5
  Top 1.27: X1.A5 X1.C5
CODE3
  Top 0.406: D3.4 21.59,58.14 21.59,71.12 16.51,76.2 X1.C6
  Top 1.27: X1.A6 X1.C6
CODE4
  Top 0.406: D3.5 20.32,58.28 20.32,68.58 15.24,73.66 X1.C7
  Top 1.27: X1.A7 X1.C7
CTRL0
  Top 0.406: X1.C18 14.66,45.72 D3.11
  Top 1.27: X1.A18 X1.C18
CTRL1
  Top 0.406: X1.C19 12.06,44.96 16.57,44.96 D3.12
  Top 1.27: X1.C19 X1.A19
CTRL2
  Top 0.406: X1.C20 12.7,43.18 12.7,44.2 16.94,44.2 D3.13
  Top 1.27: X1.A20 X1.C20
CTRL3
  Top 0.406: D3.14 17.18,43.43 13.72,43.43 13.72,41.66 X1.C21
  Top 1.27: X1.C21 X1.A21
CTRL4
  Top 0.406: X1.C22 10.16,36.2 12.06,38.1 14.61,38.1 14.61,42.67 17.55,42.67 D3.15
  Top 1.27: X1.A22 X1.C22
GND  (via drill 1.4)
  Top 0.61: R25.1 135.41,48.9 118.75,48.9 | 118.75,48.9 110.01,48.9 | 110.01,48.9 R23.1 | R29.1 59.21,48.9 67.94,48.9 | 67.94,48.9 84.61,48.9 | 84.61,48.9 93.34,48.9 | 93.34,48.9 110.01,48.9 | R27.1 84.61,48.9 | 118.75,48.9 R30.P$1 C15.2 | v93.34,46.99 93.34,48.9 | v102.23,15.75 102.23,17.53 96.14,17.53 96.14,34.92 v99.69,34.92 | R8.1 51.28,51.44 67.94,51.44 | 67.94,51.44 76.68,51.44 | 76.68,51.44 93.34,51.44 | 93.34,51.44 102.08,51.44 | 102.08,51.44 118.75,51.44 | 118.75,51.44 127.48,51.44 R14.1 | R12.1 102.08,51.44 | R10.1 76.68,51.44 | v93.34,53.34 93.34,51.44 | v84.45,84.58 84.45,82.8 90.55,82.8 90.55,65.41 v87,65.41 | 67.94,51.44 R2.P$1 C5.2 | 118.75,51.44 R1.P$1 C6.2 | C16.2 R31.P$1 67.94,48.9 | 67.94,48.9 67.94,51.44
  Bottom 0.61: 88.9,26.04 87.63,26.04 D1.BL2 87.63,31.11 C13.2 | 88.9,26.04 91.44,26.04 D1.GND 91.44,29.21 95.5,29.21 | D1.BL1 88.9,26.04 | 96.52,29.21 D1.SLP | D1.AGND 97.79,29.21 96.52,29.21 | v93.34,46.99 95.5,46.99 95.5,34.97 | 95.5,34.97 C14.- | 95.5,34.92 95.5,31.11 | 95.5,31.11 95.5,29.21 | 104.78,15.75 C12.2 v102.23,15.75 | v99.69,34.92 95.5,34.92 | D2.AGND 88.9,71.12 90.17,71.12 | 90.17,71.12 D2.SLP | C1.2 90.17,69.22 | 90.17,69.22 90.17,71.12 | 90.17,69.22 91.19,69.22 91.19,65.41 | 91.19,65.41 91.19,65.24 | 91.19,65.24 91.19,53.34 v93.34,53.34 | C4.- 91.19,65.24 | D2.BL1 97.79,74.3 | 97.79,74.3 95.25,74.3 D2.GND 95.25,71.12 90.17,71.12 | 97.79,74.3 99.06,74.3 D2.BL2 99.06,69.22 C3.2 | v87,65.41 91.19,65.41 | C11.2 95.5,31.11 | 95.5,34.97 95.5,34.92 | 95.5,29.21 96.52,29.21 | C2.2 v84.45,84.58
  Bottom 1.27: R40.1 v43.18,58.42
  other vias: 12.7,26.67 12.7,24.13 12.7,21.59 43.18,53.34 43.18,55.88
  pour Top (isolate 0.61): 49.53,48.26 52.07,45.72 64.14,45.72 64.14,40.64 75.56,40.64 75.56,45.72 89.53,45.72 89.53,40.64 100.97,40.64 100.97,45.72 114.94,45.72 114.94,40.64 126.36,40.64 126.36,45.72 139.06,45.72 139.06,52.07 47.62,52.07 47.62,48.26
  pour Top (isolate 0.61): 139.06,54.61 122.56,54.61 122.56,59.69 111.12,59.69 111.12,54.61 97.16,54.61 97.16,59.69 85.72,59.69 85.72,54.61 71.75,54.61 71.75,59.69 60.33,59.69 60.33,54.61 47.62,54.61 47.62,48.26 139.06,48.26
  pour Top (isolate 0.61): 3.81,28.57 3.81,19.68 13.97,19.68 13.97,28.57
  pour Bottom (isolate 0.61): 11.43,26.67 11.43,21.59 40.64,21.59 40.64,48.9 45.09,53.34 45.09,59.69 40.01,59.69 40.01,55.88 35.56,51.44 35.56,26.67
  pour Top (isolate 0.61): 41.27,59.69 41.27,53.34 46.35,48.26 48.26,48.26 48.26,54.61 46.35,54.61 46.35,59.69
GND1  (via drill 1.4)
  Top 0.406: C7.1 v34.29,59.69 34.29,57.15 D3.39 30.48,53.34 30.48,48.12 D3.29 37.1,41.51 C9.1 39.37,41.51 39.37,45.09 Q1.2 | R17.2 v16.51,33.02 | D3.6 17.55,59.92 C10.2
  Top 1.27: X1.A23 X1.C23 v16.51,33.02 17.78,31.75 17.78,13.46 22.23,9.02 X2.3 | X1.A9 X1.C9 v16.51,68.58 17.78,67.31 C10.2 | X1.A2 X1.C2 v16.51,86.36
  Bottom 0.61: T1.2 147.32,83.5 147.32,75.88 | 147.32,75.88 T2.2 | T3.2 147.32,68.26 | 147.32,68.26 147.32,75.88 | T4.2 147.32,60.64 | 147.32,60.64 147.32,68.26 | 147.32,60.64 143.51,60.64 143.51,3.81 22.23,3.81 X2.3
  pour Bottom (isolate 0.61): 15.24,27.94 34.29,27.94 34.29,52.07 38.73,56.52 38.73,60.96 44.45,60.96 44.45,90.17 15.24,90.17
I2CSCL
  Top 0.406: X1.C11 15.24,63.5 15.24,54.61 19.47,54.61 D3.9
  Top 1.27: X1.A11 X1.C11
I2CSDA
  Top 0.406: D3.8 19.71,55.5 16.13,55.5 16.13,66.04 X1.C10
  Top 1.27: X1.A10 X1.C10
LED1  (via drill 1.4)
  Top 0.406: D3.44 26.67,59 26.67,83.82 25.4,85.09 v25.4,87
  Bottom 0.61: v25.4,87 25.4,96.52 143.51,96.52 143.51,78.74 R36.2
LED2  (via drill 1.4)
  Top 0.406: D3.43 29.84,57.23 29.84,58.42 28.57,59.69 28.57,88.27 v30.48,88.27
  Bottom 0.61: R38.1 142.24,71.12 142.24,95.25 30.48,95.25 v30.48,88.27
LED3  (via drill 1.4)
  Top 0.406: D3.19 25.12,45.72 26.04,45.72 27.3,44.45 27.3,15.88 28.7,14.48 28.7,10.79 v30.48,10.79
  Bottom 0.61: R37.2 142.24,63.5 142.24,5.08 34.29,5.08 30.48,8.89 v30.48,10.79
LED4  (via drill 1.4)
  Top 0.406: D3.20 23.5,42.96 23.5,13.97 v25.4,12.06
  Bottom 0.61: R39.2 144.78,55.88 144.78,2.54 15.24,2.54 15.24,12.06 v25.4,12.06
MCLR
  Top 0.406: 18.41,8.38 20.95,8.38 20.95,4.32 23.5,4.32 23.5,10.16 22.23,11.43 22.23,43.95 D3.18 | 18.41,8.38 18.41,9.53 R15.1 | 18.41,8.38 18.41,6.35 X2.1
N$1
  Bottom 0.61: C2.1 78.61,86.36 88.9,86.36 D2.OSC
N$3
  Top 0.406: R16.1 20.32,40.62 C8.2 19.91,42.77 D3.17
N$4
  Top 0.406: R17.1 16.51,40.62 C8.1 16.91,40.91 D3.16
N$5
  Top 0.406: D3.7 19.42,56.92 C10.1
N$6
  Bottom 0.61: T1.3 155.42,82.55 V9.C
N$8
  Bottom 0.61: D1.OSC 97.79,13.97 107.95,13.97 107.95,15.75 C12.1
N$9
  Bottom 0.61: T2.3 155.42,74.93 V11.C
N$10
  Bottom 0.61: T3.3 155.42,67.31 V10.C
N$11
  Bottom 0.61: R19.2 R18.1 91.44,12.57 D1.ENN
N$12
  Bottom 0.61: T4.3 155.42,59.69 V12.C
N$13
  Bottom 0.61: R32.1 151.92,77.47 V9.A
N$14
  Bottom 0.61: R33.1 151.92,69.85 V11.A
N$15
  Bottom 0.61: R34.1 151.92,62.23 V10.A
N$16
  Bottom 0.61: R35.1 151.92,54.61 V12.A
N$17
  Bottom 0.61: R36.1 148.76,78.74 T1.1
N$18
  Bottom 0.61: D2.ENN 95.25,87.76 R3.1 R4.2
N$19
  Bottom 0.61: R37.1 148.76,63.5 T3.1
N$20
  Bottom 0.61: R38.2 148.76,71.12 T2.1
N$21
  Bottom 0.61: R39.1 148.76,55.88 T4.1
OSC1
  Top 0.406: D3.31 34.58,46.28 Q1.1
OSC2
  Top 0.406: D3.30 35.85,43.88 Q1.3
PGC
  Top 0.406: D3.22 26.04,15.75 27.94,13.84 27.94,10.16 27.3,9.53 X2.5
PGD
  Top 0.406: D3.21 24.77,43.1 24.77,15.75 27.18,13.34 27.18,10.79 24.77,8.38 X2.4

## Text on the board
Top: B1 | A1 | A2 | B2 | B1 | B1 | B2 | A2 | A1 | B2
Bottom: B1-A | B1-B | B2-B | B2-A